# Altium PCB RUMBA_TFT.PcbDoc
Units mm, origin at the board's own origin, x right, y up, seen from the top; angles counter-clockwise.
Board outline 18.29 x 18.29 mm, 2 copper layers (Component Side, Solder Side), stack 1.57 mm thick; 8 components, 8 nets, 40 pads, 0 vias.
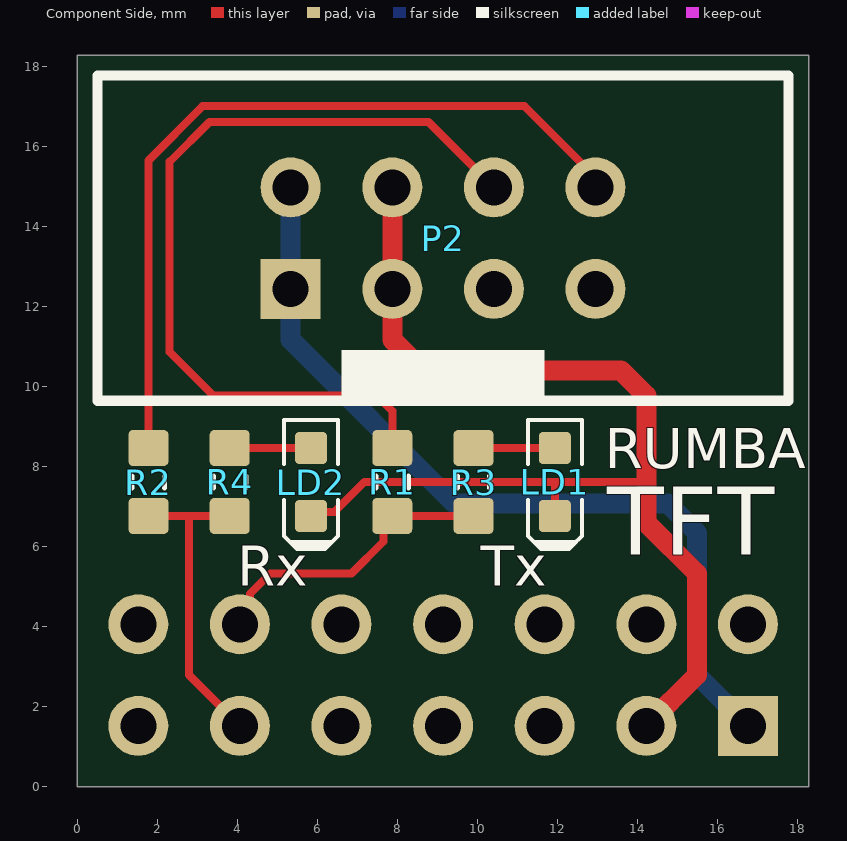
[diagram p0: Component Side view]
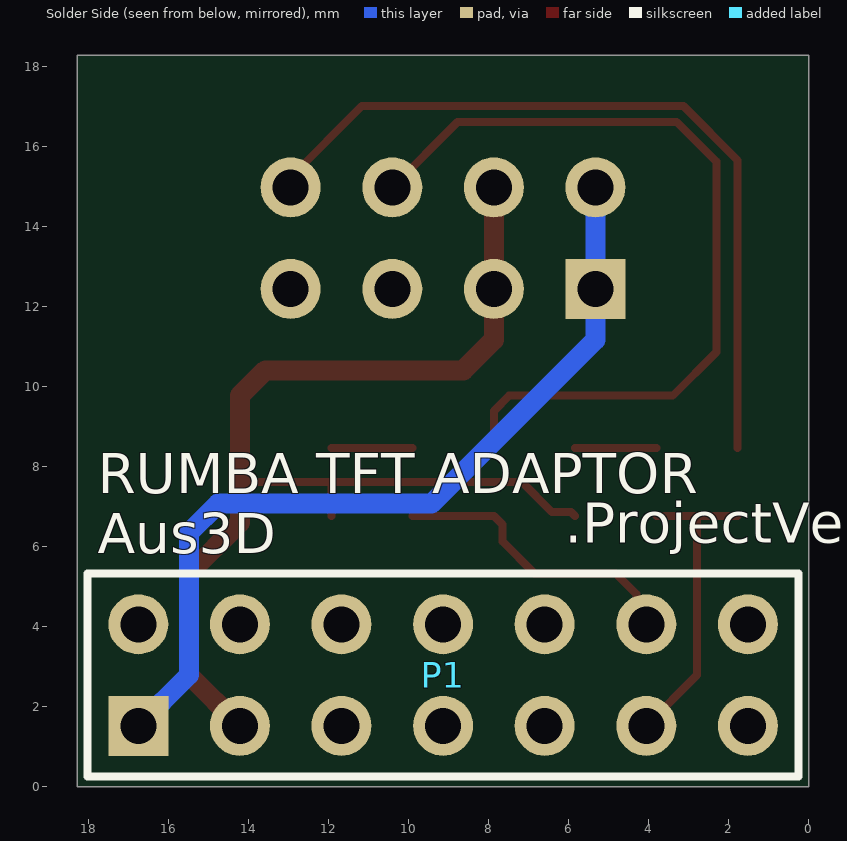
[diagram p1: Solder Side view, seen from below]

## Layer stack, top to bottom
Top Solder: solder mask 0.0102, Solder Resist, Dk 3.5
Component Side: signal copper 0.035
Dielectric 3: prepreg 1.5, Dk 4.2
Solder Side: signal copper 0.035
Bottom Solder: solder mask 0.0102, Solder Resist, Dk 3.5

## Board outline
0,0 0,18.288 18.288,18.288 18.288,0

## Design rules (kind name [scope] priority, off if disabled: settings)
AssemblyTestPointUsage [All] p1 off:
AssemblyTestpoint [All] p1 off: testpointundercomponent=TRUE minsize=1.016 maxsize=2.54 preferedsize=1.524 minholesize=0 maxholesize=1.016 preferedholesize=0.813 testpointgrid=0.025 usegrid=TRUE gridtolerance=0 allowsidetop=TRUE allowsidebottom=TRUE
Clearance Clearance_1 [InNet('VIN1') OR InNet('VIN2') OR InNet('VIN') OR InNet('+12V') OR InNet('NetF2_0') OR InNet('NetF1_0') OR InNet('NetD13_A') OR InNet('VMOT')] p1: gap=0.25 ignorepadtopadclearanceinfootprint=FALSE
Clearance [All] p2: gap=0.2 ignorepadtopadclearanceinfootprint=FALSE except(0: Arc-Hole Track-Hole SMDPad-Hole THPad-Hole Via-Hole Fill-Hole Poly-Hole Region-Hole Text-Hole; 0.25: THPad-Fill THPad-Poly THPad-Region)
ComponentClearance [All] p1: gap=0.2 collisioncheckmode=3 verticalgap=0.25 showdistances=FALSE
DiffPairsRouting [All] p1: maxlimit=1 minlimit=0.2 mostfreqgap=0.2 toplayer_minwidth=0.2 toplayer_maxwidth=0.2 toplayer_prefwidth=0.2 bottomlayer_minwidth=0.2 bottomlayer_maxwidth=0.2 bottomlayer_prefwidth=0.2 maxuncoupledlength=12.7
FabricationTestPointUsage [All] p1 off: valid=0 allowmultiple=FALSE
FabricationTestpoint [All] p1 off: side=3 testpointundercomponent=TRUE minsize=1.016 maxsize=2.54 preferedsize=1.524 minholesize=0 maxholesize=1.016 preferedholesize=0.813 testpointgrid=0.025 allowsidetop=TRUE allowsidebottom=TRUE usegrid=TRUE gridtolerance=0
HoleSize [All] p1: absolutevalues=TRUE maxlimit=4 minlimit=0.025 maxpercent=80.000 minpercent=20.000
MinimumSolderMaskSliver [All] p1: minsoldermaskwidth=0
NetAntennae [All] p1 off: netantennaetolerance=0
PolygonConnect PolygonConnect_Via [All vs IsVia] p1: connectstyle=Direct reliefconductorwidth=0.254 reliefentries=4 polygonreliefangle="90 Angle" airgapwidth=0.254
PolygonConnect PolygonConnect_Specific [All vs IsPad AND ( InNet('HE_0') OR InNet('NetD9_A') OR InNet('NetD10_A') OR InNet('NetD11_A') OR InNet('NetD12_A') OR InNet('NetD13_A') OR InNet('NetD14_A') OR InNet('VIN2') OR InNet('NetC33_2') OR InNet('NetF1_0') OR InNet('NetF2_0') )] p2: connectstyle=Direct reliefconductorwidth=0.254 reliefentries=4 polygonreliefangle="90 Angle" airgapwidth=0.254
PolygonConnect PolygonConnect_Specific_1 [All vs IsPad AND ( InComponent('HB-PWR') OR InComponent('MAIN-PWR') OR InComponent('HB-OUT') OR InComponent('IC4') OR InComponent('U1') OR InComponent('L2') OR InComponent('D5') OR InComponent('D6') OR InComponent('U4') OR InComponent('L1') OR InComponent('U3') OR InComponent('F1') OR InComponent('F2') OR InComponent('C37')OR InComponent('C43') OR InComponent('C44') )] p3: connectstyle=Direct reliefconductorwidth=0.254 reliefentries=4 polygonreliefangle="90 Angle" airgapwidth=0.254
PolygonConnect [All] p4: connectstyle=Relief reliefconductorwidth=0.254 reliefentries=4 polygonreliefangle="90 Angle" airgapwidth=0.254
RoutingVias [All] p1: holewidth=0.4 width=0.8 viastyle="Through Hole" minholewidth=0.35 minwidth=0.7 maxholewidth=1 maxwidth=1.5
SilkToSilkClearance [All] p1: silktosilkclearance=0.1
SilkToSolderMaskClearance SilkscreenOverComponentPads [IsPad] p1: minsilkscreentomaskgap=0 clearancetoexposedcopper=TRUE
SolderMaskExpansion [All] p1: expansion=0.102 istentingtop=FALSE
Width Width_1 [All] p1: maxlimit=3 minlimit=0.2 preferedwidth=0.254 minimp=50.000000 maximp=50.000000 favimp=50.000000
19 further rules are at their usual default settings.

## Components (designator, comment, footprint, x,y, rotation, side; value= is the part's Value field where it differs from the comment)
LD1 "" "LED 1608-0603" 11.938,7.62 r270 top
LD2 "" "LED 1608-0603" 5.842,7.62 r270 top
P1 "Header 2X7" "HDR2X7-HEADER FEMALE" 16.764,1.524 r180 bottom
P2 "Header 2X4" "HDR2X4-HEADER FEMALE - SHROUDED" 5.334,12.446 r0 top
R1 "Resistor" "RES 1608-0603" 7.874,7.62 r270 top value=100R
R2 "Resistor" "RES 1608-0603" 1.778,7.62 r270 top value=100R
R3 "Resistor" "RES 1608-0603" 9.906,7.62 r270 top value=1K
R4 "Resistor" "RES 1608-0603" 3.81,7.62 r270 top value=1K

## Footprints (in the part's own frame and the unit in brackets; to place one, negate y for a bottom-side part, rotate by r counter-clockwise, add the part's x,y. Pads: shape width x height; smd on the part's side, far side on the other; paste and mask are expansions set on the pad)
"HDR2X4-HEADER FEMALE - SHROUDED" [mm]
  rect 1.5x1.5 hole 0.9: 1(0,0)
  round 1.5 hole 0.9: 2(0,2.54) 3(2.54,0) 4(2.54,2.54) 5(5.08,0) 6(5.08,2.54) 7(7.62,0) 8(7.62,2.54)
  silkscreen extent -4.83,-2.79 12.45,5.33, body extent -5.08,-3.21 12.7,5.68, height 9.05
"HDR2X7-HEADER FEMALE" [mm]
  rect 1.5x1.5 hole 0.9: 1(0,0)
  round 1.5 hole 0.9: 2(0,2.54) 3(2.54,0) 4(2.54,2.54) 5(5.08,0) 6(5.08,2.54) 7(7.62,0) 8(7.62,2.54) 9(10.16,0) 10(10.16,2.54) 11(12.7,0) 12(12.7,2.54) 13(15.24,0) 14(15.24,2.54)
  silkscreen extent -1.27,-1.27 16.51,3.81, body extent -1.25,-1.24 16.53,3.84, height 8.5
"LED 1608-0603" [mm]
  round 0.254 on Mech15: 0(0,0)
  rrect25% 0.8x0.8 smd: 1(-0.85,0) 2(0.85,0)
  Component Side pour cut-out: -0.5,0.5 0.5,0.5 0.5,-0.5 -0.5,-0.5
  silkscreen extent -1.55,-0.67 1.68,0.67, body extent -0.8,-0.4 0.8,0.4, height 0.75
"RES 1608-0603" [mm]
  round 0.254 on Mech15: 0(0,0)
  rrect25% 0.9x1 smd: 1(-0.85,0) 2(0.85,0)
  Component Side pour cut-out: -0.6,0.5 -0.4,0.7 0.4,0.7 0.6,0.5 0.6,-0.5 0.4,-0.7 -0.4,-0.7 -0.6,-0.5
  silkscreen extent -0.15,-0.41 0.15,0.41, body extent -0.87,-0.47 0.88,0.48, height 0.54

## Part data
LD1 LD2: library part "LEDY  0603", "LED YELLOW CLEAR CHIP SMD 0603", Supplier Part Number 1=160-1437-1-ND, Note="Approved sub OK", Supplier 1=Digi-Key
P1: library part "Header 2X7 Female", "Header, 7-Pin, Dual row, Female", Manufacturer 1="Generic Header", Note="Approved sub OK"
P2: "Header, 4-Pin, Dual row, Shrouded", Manufacturer 1=Molex, Supplier Part Number 1=900-0702460801-ND, Note="Approved sub OK", Supplier 1=Digi-Key
R1 R2: library part RC0603FR-07100RL, "RES SMD 100 OHM 1% 1/10W 0603", Manufacturer 1=Yageo, Operating Temperature="-55°C ~ 155°C", Package / Case="0603 (1608 Metric)", Power (Watts)="0.1W, 1/10W", Supplier Part Number 1=311-100HRCT-ND, Temperature Coefficient=±100ppm/°C, TOLERANCE=±1%, Composition="Thick Film", Features="Moisture Resistant", Height - Seated (Max)="0.022\" (0.55mm)", Manufacturer Part Number 1=RC0603FR-07100RL, Note="Approved sub OK", Published=8-Jun-2000, Publisher="Altium Limited", Revision="July-2002: Re-released for DXP Platform.", Size / Dimension="0.063\" L x 0.031\" W (1.60mm x 0.80mm)", Supplier 1=Digi-Key
R3 R4: library part RC0603FR-071KL, "RES SMD 1K OHM 1% 1/10W 0603", Manufacturer 1=Yageo, Operating Temperature="-55°C ~ 155°C", Package / Case="0603 (1608 Metric)", Power (Watts)="0.1W, 1/10W", Supplier Part Number 1=311-1.00KHRCT-ND, Temperature Coefficient=±100ppm/°C, TOLERANCE=±1%, Composition="Thick Film", Features="Moisture Resistant", Height - Seated (Max)="0.022\" (0.55mm)", Manufacturer Part Number 1=RC0603FR-071KL, Note="Approved sub OK", Published=8-Jun-2000, Publisher="Altium Limited", Revision="July-2002: Re-released for DXP Platform.", Size / Dimension="0.063\" L x 0.031\" W (1.60mm x 0.80mm)", Supplier 1=Digi-Key

## Nets (pads, with @x,y where several pads share a name; then routed paths per layer and width w, separated by ;. In a path a pad name is that pad's centre, name@x,y a point inside that pad or via, vN(x,y) a via of type N, cw(c..) or ccw(c..) an arc to the next point about the centre after c; other vN are vias at no path point)
+5V: P1.1 P2.1 P2.2 | length 21.3
  Solder Side w0.5: P2.2 P2.1 5.334,11.176 9.432,7.078 14.766,7.078 15.494,6.35 15.494,2.794 P1.1
GND: LD1.2 LD2.2 P1.3 P2.3 P2.4 | length 29.6
  Component Side w0.2: LD2.2 5.943,6.871 6.425,6.871 7.174,7.62 11.938,7.62 14.224,7.62 ; LD1.2 11.938,7.62
  Component Side w0.5: P2.4 P2.3 7.874,11.176 8.636,10.414 13.589,10.414 14.224,9.779 14.224,7.62 14.224,6.604 15.494,5.334 15.494,2.794 P1.3
HOST_RX: P1.11 R2.2 R4.2 | length 7.8
  Component Side w0.2: R2.2 2.794,6.77 ; R4.2 2.794,6.77 ; P1.11 2.794,2.794 2.794,6.77
HOST_TX: P1.12 R1.2 R3.2 | length 7.5
  Component Side w0.2: P1.12 4.313,4.313 4.313,4.821 4.826,5.334 6.858,5.334 7.661,6.137 7.661,6.557 R1.2 R3.2
NetLD1_1: LD1.1 R3.1 | length 2
  Component Side w0.2: R3.1 LD1.1
NetLD2_1: LD2.1 R4.1 | length 2
  Component Side w0.2: R4.1 LD2.1
NetP2_6: P2.6 R1.1 | length 21.2
  Component Side w0.2: R1.1 7.874,9.398 7.493,9.779 3.404,9.779 2.311,10.872 2.311,15.627 3.302,16.618 8.782,16.618 P2.6 ; P2.6@10.287,14.859 P2.6@10.414,14.732
NetP2_8: P2.8 R2.1 | length 19.9
  Component Side w0.2: R2.1 1.778,15.66 3.136,17.018 11.176,17.018 12.954,15.24 P2.8
pads on no net: LD1.0 LD2.0 P1.2 P1.4 P1.5 P1.6 P1.7 P1.8 P1.9 P1.10 P1.13 P1.14 P2.5 P2.7 R1.0 R2.0 R3.0 R4.0

## Silkscreen, mask and mechanical layers (free items; w line width, h text height)
Top Overlay:
  text "RUMBA" at 13.187,7.966 h1
  text "TFT" at 13.254,5.796 h1.7
  text "Rx" at 3.993,5.026 h1
  text "Tx" at 10.089,5.026 h1
Bottom Overlay:
  text ".ProjectVersionString" at 6.096,6.096 h1
  text "RUMBA TFT ADAPTOR / Aus3D" at 17.78,5.842 h1
Mechanical 4:
  the board outline again, w0.254
Mechanical 16:
  lines w0.5: -11.5,-8 -5.5,-8 ; -11.5,-8 -5.5,-8 ; -11.5,-8 -5.5,-8 ; -11.5,-3 -11.5,-13 -5.5,-13 ; -11.5,-3 -5.5,-3 ; -11.5,-3 -5.5,-3 ; -5.5,-13 -5.5,-3 ; -5.5,-13 0.5,-13 ; -5.5,-8 0.5,-8 ; -5.5,-8 0.5,-8 ; -5.5,-8 0.5,-8 ; -5.5,-3 0.5,-3 ; -5.5,-3 0.5,-3 ; 0.5,-13 0.5,-3 ; 0.5,-13 6.5,-13 ; 0.5,-8 6.5,-8 ; 0.5,-8 6.5,-8 ; 0.5,-8 6.5,-8 ; 0.5,-3 6.5,-3 ; 0.5,-3 6.5,-3 ; 6.5,-13 6.5,-3 ; 6.5,-13 12.5,-13 ; 6.5,-8 12.5,-8 ; 6.5,-8 12.5,-8 ; 6.5,-8 12.5,-8 ; 6.5,-3 12.5,-3 ; 6.5,-3 12.5,-3 ; 12.5,-13 12.5,-3 ; 12.5,-13 18.5,-13 ; 12.5,-8 18.5,-8 ; 12.5,-8 18.5,-8 ; 12.5,-8 18.5,-8 ; 12.5,-3 18.5,-3 ; 12.5,-3 18.5,-3 ; 18.5,-13 18.5,-3 ; 18.5,-13 24.5,-13 ; 18.5,-8 24.5,-8 ; 18.5,-8 24.5,-8 ; 18.5,-8 24.5,-8 ; 18.5,-3 24.5,-3 ; 18.5,-3 24.5,-3 ; 24.5,-13 24.5,-3 ; 24.5,-13 30.5,-13 30.5,-3 ; 24.5,-8 30.5,-8 ; 24.5,-8 30.5,-8 ; 24.5,-8 30.5,-8 ; 24.5,-3 30.5,-3 ; 24.5,-3 30.5,-3
  text "HOST / TX" at -4.953,-7.378 h1.2
  text "GND" at 19.901,-11.1 h1.2
  text "+5V" at 25.901,-11.1 h1.2
  text "HOST / RX" at -4.953,-12.378 h1.2